# EAGLE board lh.job (EAGLE 6.4)
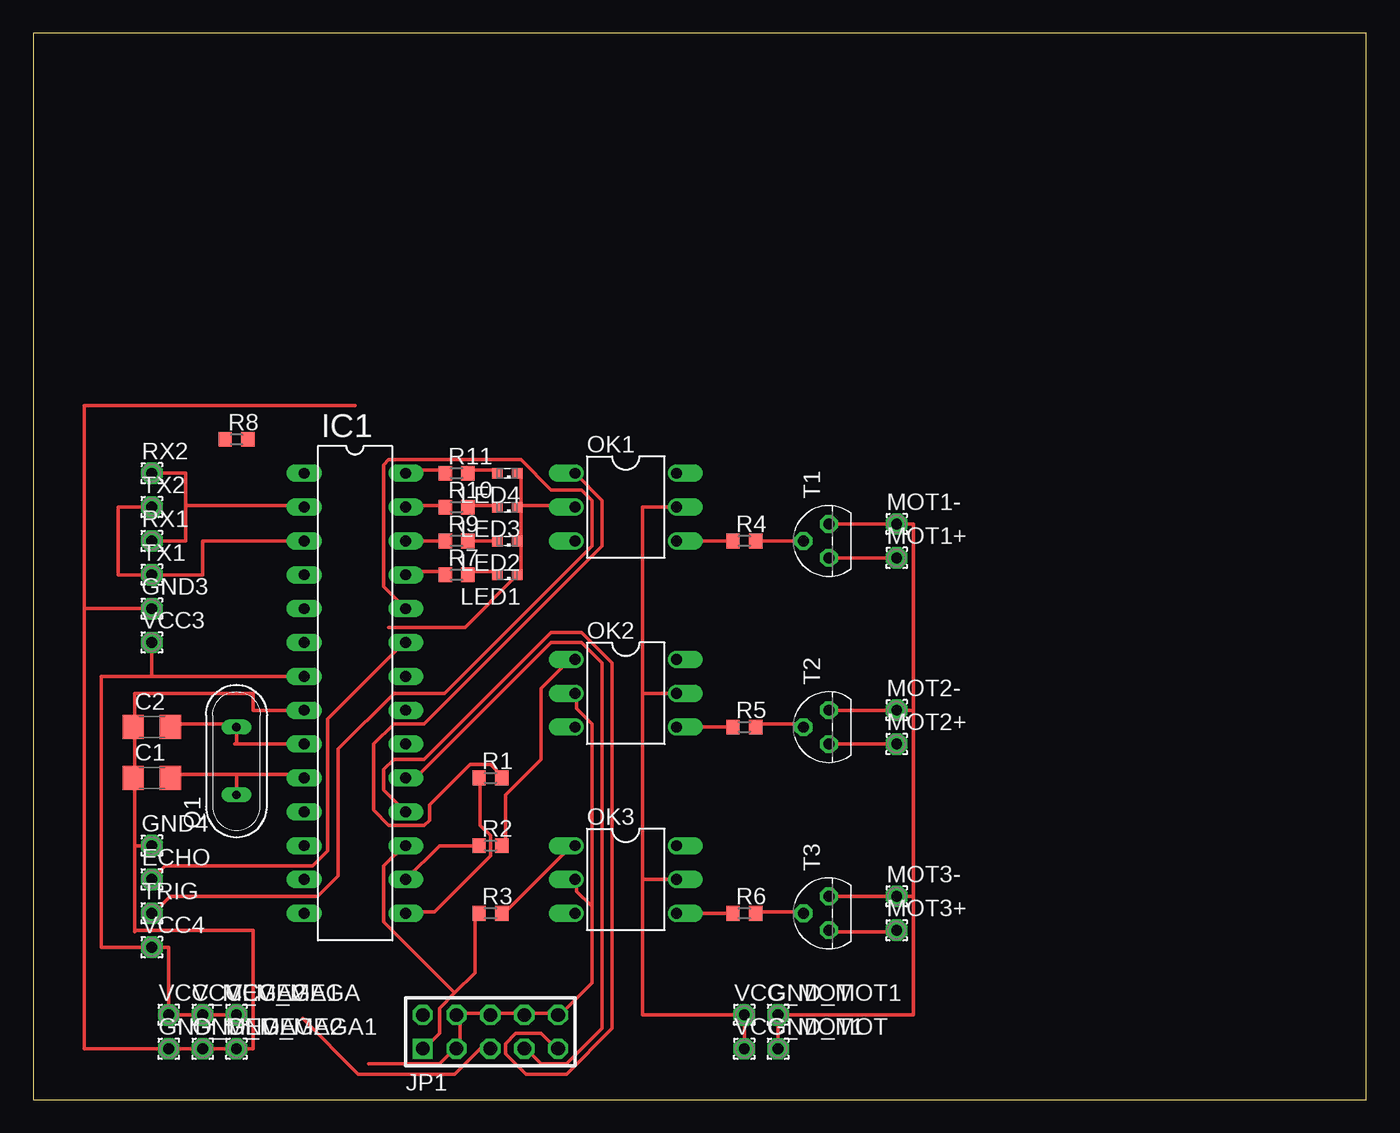
[diagram p0: board, top side]

Size 100 x 80 mm. Coordinates in mm from the lower left corner, seen from the top.
Outline: 0,0 100,0 100,80 0,80 0,0
Copper layers (1*16): Top 0.035mm / dielectric 1.5mm / Bottom 0.035mm
Design rules "default": minimum track width 10mil, minimum drill 24mil, track to track 8mil, track to pad 8mil, pad to pad 8mil, via to via 8mil, smd to smd 8mil, copper to edge 40mil, drill to drill 8mil, minimum pad ring 10mil, minimum via ring 8mil, stop-mask expansion 4mil, vias tented up to drill 0mil, thermal gap 10mil

## Footprints (pad centres in the part's own frame; a part is rotated, then mirrored left to right if it is on the bottom)
C1206 = smd 1.6 x 1.8: 1 -1.4,0; 2 1.4,0
1,6/0,8 = drill 0.813 pad 1.6 octagon: 1 0,0
DIL28-3 = drill 0.813 long: 1 -16.51,-3.81; 2 -13.97,-3.81; 3 -11.43,-3.81; 4 -8.89,-3.81; 5 -6.35,-3.81; 6 -3.81,-3.81; 7 -1.27,-3.81; 8 1.27,-3.81; 9 3.81,-3.81; 10 6.35,-3.81; 11 8.89,-3.81; 12 11.43,-3.81; 13 13.97,-3.81; 14 16.51,-3.81; 15 16.51,3.81; 16 13.97,3.81; 17 11.43,3.81; 18 8.89,3.81; 19 6.35,3.81; 20 3.81,3.81; 21 1.27,3.81; 22 -1.27,3.81; 23 -3.81,3.81; 24 -6.35,3.81; 25 -8.89,3.81; 26 -11.43,3.81; 27 -13.97,3.81; 28 -16.51,3.81
AVR-ISP-10 = drill 1.016 square: 1 -5.08,-1.27 | drill 1.016 octagon: 2 -5.08,1.27; 3 -2.54,-1.27; 4 -2.54,1.27; 5 0,-1.27; 6 0,1.27; 7 2.54,-1.27; 8 2.54,1.27; 9 5.08,-1.27; 10 5.08,1.27
SML0603 = smd 0.8 x 0.8: A 0.75,0; C -0.75,0
DIL06 = drill 0.813 offset: 1 -2.54,-3.81; 2 0,-3.81; 3 2.54,-3.81; 4 2.54,3.81; 5 0,3.81; 6 -2.54,3.81
QS = drill 0.61 long: 1 -2.54,0; 2 2.54,0
R0603 = smd 1 x 1.1: 1 -0.85,0; 2 0.85,0
TO92 = drill 0.813 octagon: 1 1.27,0; 2 0,1.905; 3 -1.27,0

## Placement (x,y rotation side)
C1  [C1206]  8.89,24.13 0 top
C2  [C1206]  8.89,27.94 0 top
ECHO  [1,6/0,8]  8.89,16.51 0 top
GND3  [1,6/0,8]  8.89,36.83 0 top
GND4  [1,6/0,8]  8.89,19.05 0 top
GND_MEGA  [1,6/0,8]  10.16,3.81 0 top
GND_MEGA1  [1,6/0,8]  15.24,3.81 0 top
GND_MEGA2  [1,6/0,8]  12.7,3.81 0 top
GND_MOT  [1,6/0,8]  55.88,3.81 0 top
GND_MOT1  [1,6/0,8]  55.88,6.35 0 top
IC1  MEGA8-P  [DIL28-3]  24.13,30.48 270 top
JP1  AVR-ISP-10  [AVR-ISP-10]  34.29,5.08 0 top
LED1  [SML0603]  35.56,39.37 180 top
LED2  [SML0603]  35.56,41.91 180 top
LED3  [SML0603]  35.56,44.45 180 top
LED4  [SML0603]  35.56,46.99 180 top
MOT1+  [1,6/0,8]  64.77,40.64 0 top
MOT1-  [1,6/0,8]  64.77,43.18 0 top
MOT2+  [1,6/0,8]  64.77,26.67 0 top
MOT2-  [1,6/0,8]  64.77,29.21 0 top
MOT3+  [1,6/0,8]  64.77,12.7 0 top
MOT3-  [1,6/0,8]  64.77,15.24 0 top
OK1  4N35  [DIL06]  44.45,44.45 270 top
OK2  4N35  [DIL06]  44.45,30.48 270 top
OK3  4N35  [DIL06]  44.45,16.51 270 top
Q1  [QS]  15.24,25.4 90 top
R1  200om  [R0603]  34.29,24.13 0 top
R2  200Om  [R0603]  34.29,19.05 0 top
R3  200Om  [R0603]  34.29,13.97 0 top
R4  1K  [R0603]  53.34,41.91 0 top
R5  1K  [R0603]  53.34,27.94 0 top
R6  1K  [R0603]  53.34,13.97 0 top
R7  [R0603]  31.75,39.37 0 top
R8  10K  [R0603]  15.24,49.53 0 top
R9  [R0603]  31.75,41.91 0 top
R10  [R0603]  31.75,44.45 0 top
R11  [R0603]  31.75,46.99 0 top
RX1  [1,6/0,8]  8.89,41.91 0 top
RX2  [1,6/0,8]  8.89,46.99 0 top
T1  2N3904  [TO92]  59.69,41.91 90 top
T2  2N3904  [TO92]  59.69,27.94 90 top
T3  2N3904  [TO92]  59.69,13.97 90 top
TRIG  [1,6/0,8]  8.89,13.97 0 top
TX1  [1,6/0,8]  8.89,39.37 0 top
TX2  [1,6/0,8]  8.89,44.45 0 top
VCC3  [1,6/0,8]  8.89,34.29 0 top
VCC4  [1,6/0,8]  8.89,11.43 0 top
VCC_MEGA  [1,6/0,8]  15.24,6.35 0 top
VCC_MEGA1  [1,6/0,8]  12.7,6.35 0 top
VCC_MEGA2  [1,6/0,8]  10.16,6.35 0 top
VCC_MOT  [1,6/0,8]  53.34,6.35 0 top
VCC_MOT1  [1,6/0,8]  53.34,3.81 0 top

## Library data of the parts
C1 C2 = eagle-ltspice; SPICEMODEL: NONE; SPICEPREFIX: C
ECHO GND3 GND4 GND_MEGA GND_MEGA1 GND_MEGA2 GND_MOT GND_MOT1 MOT1+ MOT1- MOT2+ MOT2- MOT3+ MOT3- RX1 RX2 TRIG TX1 TX2 VCC3 VCC4 VCC_MEGA VCC_MEGA1 VCC_MEGA2 VCC_MOT VCC_MOT1 = wirepad
IC1 = atmel; OC_FARNELL: unknown; OC_NEWARK: unknown
JP1 = avr-5
LED1-LED4 = led
OK1-OK3 = optocoupler; MF: FAIRCHILD SEMICONDUCTOR; MPN: 4N35; OC_FARNELL: 1328375; OC_NEWARK: 72K9946
Q1 = special
R1-R11 = rcl
T1-T3 = transistor

## Nets
AVCC: IC1.20
GND: IC1.22
N$1: IC1.15 R1.1
N$2: IC1.16 R2.1
N$3: IC1.17 JP1.1 R3.1
N$4: OK1.1 R1.2
N$5: OK2.1 R2.2
N$6: OK3.1 R3.2
N$7: OK1.4 R4.1
N$8: R5.1
N$9: OK3.4
N$10: R6.2 T3.2
N$11: IC1.25 R7.1
N$12: OK2.5 VCC_MOT1.1 VCC_MOT.1
N$13: MOT1+.1 T1.3
N$14: MOT2+.1 T2.3
N$15: MOT3+.1 T3.3
N$16: IC1.9 Q1.2
N$17: C1.2 IC1.10 Q1.1
N$18: IC1.19 JP1.7
N$19: IC1.18 JP1.9
N$20: R4.2 T1.2
N$21: IC1.24 TRIG.1
N$22: ECHO.1 IC1.23
N$23: IC1.2
N$24: IC1.3 TX1.1 TX2.1
N$25: R5.2 T2.2
N$26: IC1.7 VCC3.1 VCC4.1 VCC_MEGA1.1 VCC_MEGA2.1 VCC_MEGA.1
N$27: IC1.27 R10.1
N$28: IC1.26 R9.1
N$29: JP1.3 JP1.4 JP1.6 JP1.8 JP1.10 OK2.2 OK3.2
N$30: IC1.28 R11.1
N$31: LED1.A R7.2
N$32: LED2.A R9.2
N$33: LED3.A R10.2
N$34: LED4.A R11.2
N$36: OK2.4
N$37: R6.1
N$38: GND_MOT1.1 GND_MOT.1 MOT1-.1 MOT3-.1 T1.1 T2.1 T3.1
S$1: IC1.8
S$2: LED1.C LED2.C LED3.C LED4.C OK1.2
S$3: JP1.5
S$4: C2.2
S$6: RX1.1 RX2.1
S$7: C1.1 C2.1 GND3.1 GND4.1 GND_MEGA1.1 GND_MEGA2.1 GND_MEGA.1

## Tracks (layer width: path | path; a pad name or v marks a point on that pad's centre or on a via)
N$1
  Top 0.254: R1.1 33.53,24 33.53,20.57 34.29,19.81 34.29,18.29 30.1,14.1 28.19,14.1 IC1.15
N$2
  Top 0.254: R2.1 30.48,19.05 IC1.16
N$3
  Top 0.254: 31.62,8 30.48,6.86 30.48,4.95 29.34,3.81 JP1.1 | 31.62,8 33.15,9.53 33.15,13.72 R3.1 | 31.62,8 26.29,13.34 26.29,17.53 27.81,19.05 IC1.17
N$4
  Top 0.254: OK1.1 42.67,44.96 42.67,41.53 29.34,28.19 27.05,28.19 25.53,26.67 25.53,21.72 26.67,20.57 29.34,20.57 29.72,20.95 29.72,22.1 32.77,25.15 34.29,25.15 35.05,24.38 R1.2
N$5
  Top 0.254: R2.2 35.43,19.05 35.43,22.86 38.1,25.53 38.1,30.86 40.39,33.15 OK2.1
N$6
  Top 0.254: R3.2 35.43,14.1 40.39,19.05 OK3.1
N$7
  Top 0.254: OK1.4 R4.1
N$8
  Top 0.254: 52.2,28.19 R5.1
N$9
  Top 0.254: OK3.4 52.07,13.97
N$10
  Top 0.254: R6.2 54.48,14.1 57.53,14.1 T3.2
N$11
  Top 0.254: R7.1 30.86,39.62 28.19,39.62 IC1.25
N$12
  Top 0.254: 48.01,30.48 OK2.5 45.72,30.48 | VCC_MOT1.1 VCC_MOT.1 45.72,6.35 45.72,16.51 | 45.72,16.51 49.53,16.51 | 45.72,16.51 45.72,30.48 | 45.72,30.48 45.72,44.45 49.53,44.45
N$13
  Top 0.254: MOT1+.1 T1.3
N$14
  Top 0.254: MOT2+.1 T2.3
N$15
  Top 0.254: T3.3 59.82,12.57 64.77,12.57 MOT3+.1
N$16
  Top 0.254: 15.11,26.67 15.24,26.67 | 15.24,26.67 IC1.9 | 15.24,26.67 Q1.2
N$17
  Top 0.254: 15.24,24.38 20.19,24.38 IC1.10 | 15.24,24.38 10.67,24.38 C1.2 | 15.24,24.38 Q1.1
N$18
  Top 0.254: IC1.19 28.19,24.38 28.96,24.38 38.86,34.29 41.15,34.29 42.67,32.77 42.67,5.33 40.01,2.67 38.1,2.67 36.96,3.81 JP1.7
N$19
  Top 0.254: IC1.18 26.29,23.24 26.29,24.77 27.05,25.53 29.34,25.53 38.86,35.05 41.15,35.05 43.43,32.77 43.43,5.33 40.01,1.91 36.96,1.91 35.43,3.43 35.43,4.19 36.2,4.95 38.1,4.95 39.24,3.81 JP1.9
N$20
  Top 0.254: T1.2 R4.2
N$21
  Top 0.254: IC1.24 26.29,38.48 26.29,47.62 26.67,48.01 36.58,48.01 38.86,45.72 41.15,45.72 41.91,44.96 41.91,41.53 30.86,30.48 27.05,30.48 22.86,26.29 22.86,16.76 21.34,15.24 10.29,15.24 9.14,14.1 TRIG.1
N$22
  Top 0.254: ECHO.1 9.91,17.53 20.95,17.53 22.1,18.67 22.1,28.57 27.81,34.29 IC1.23
N$23
  Top 0.254: 11.43,44.58 20.19,44.58 IC1.2
N$24
  Top 0.254: IC1.3 12.7,41.91 12.7,39.37 TX1.1 6.35,39.37 6.35,44.45 TX2.1
N$25
  Top 0.254: R5.2 54.48,28.19 57.53,28.19 T2.2
N$26
  Top 0.254: IC1.7 8.89,31.75 | VCC3.1 8.89,31.75 | 8.89,31.75 5.08,31.75 5.08,11.43 VCC4.1 10.16,11.43 VCC_MEGA2.1 VCC_MEGA1.1 VCC_MEGA.1
N$27
  Top 0.254: R10.1 30.86,44.58 28.19,44.58 IC1.27
N$28
  Top 0.254: IC1.26 R9.1
N$29
  Top 0.254: 34.29,6.48 32,6.48 JP1.4 32,6.1 32,3.81 JP1.3 31.62,3.81 30.48,2.67 25.15,2.67 | 41.91,14.48 40.77,15.62 40.77,16.38 OK3.2 | 41.91,14.48 41.91,8.76 39.62,6.48 JP1.10 39.24,6.48 36.96,6.48 JP1.8 36.58,6.48 34.29,6.48 | 41.91,14.48 41.91,28.19 40.77,29.34 40.77,30.48 OK2.2 | 34.29,6.48 JP1.6
N$30
  Top 0.254: R11.1 30.86,47.24 28.19,47.24 IC1.28
N$31
  Top 0.254: LED1.A 34.67,39.62 32.77,39.62 R7.2
N$32
  Top 0.254: R9.2 LED2.A
N$33
  Top 0.254: LED3.A 34.67,44.58 32.77,44.58 R10.2
N$34
  Top 0.254: LED4.A 34.67,47.24 32.77,47.24 R11.2
N$36
  Top 0.254: 52.07,27.94 49.53,27.94 OK2.4
N$37
  Top 0.254: 52.2,14.1 R6.1
N$38
  Top 0.254: GND_MOT.1 GND_MOT1.1 66.04,6.35 66.04,15.24 | T1.1 MOT1-.1 66.04,43.18 66.04,29.21 | T2.1 66.04,29.21 | 66.04,29.21 66.04,15.24 | T3.1 MOT3-.1 66.04,15.24
S$1
  Top 0.254: IC1.8 16.51,29.21 16.51,30.48 7.62,30.48 7.62,27.94
S$2
  Top 0.254: OK1.2 40.39,44.58 36.58,44.58 | LED4.C 36.58,46.86 36.58,44.58 | 36.58,44.58 LED3.C 36.58,44.2 36.58,41.91 | 36.58,41.91 LED2.C | 36.58,41.91 36.58,39.62 LED1.C 36.2,39.24 32.38,35.43 26.67,35.43
S$3
  Top 0.254: JP1.5 33.53,3.81 31.62,1.91 24.38,1.91 20.19,6.1
S$4
  Top 0.254: C2.2 10.67,28.19 15.24,28.19
S$6
  Top 0.254: RX1.1 11.43,41.91 11.43,46.99 RX2.1
S$7
  Top 0.254: 7.62,28.19 C2.1 7.62,27.81 7.62,24.38 C1.1 7.62,24 7.62,19.05 | GND4.1 7.62,19.05 | 7.62,19.05 7.62,12.7 | 7.62,12.7 7.62,12.57 | 7.62,12.7 16.51,12.7 16.51,3.81 GND_MEGA1.1 GND_MEGA2.1 GND_MEGA.1 3.81,3.81 3.81,36.83 | 3.81,36.83 GND3.1 | 3.81,36.83 3.81,52.07 24.13,52.07